# EAGLE board switch_strip (EAGLE 9.2.2)

Size 46.97 x 120.32 mm. Coordinates in mm from the lower left corner, seen from the top.
Outline: 0,0 46.97,0 46.97,120.32 0,120.32 0,0
Copper layers (1*16): Top 0.035mm / dielectric 1.5mm / Bottom 0.035mm
Design rules "default": minimum track width 6mil, minimum drill 0.35mm, track to track 6mil, track to pad 6mil, pad to pad 6mil, via to via 6mil, smd to smd 6mil, copper to edge 40mil, drill to drill 6mil, minimum pad ring 10mil, minimum via ring 8mil, stop-mask expansion 4mil, vias tented up to drill 0mil, thermal gap 10mil

## Footprints (pad centres in the part's own frame; a part is rotated, then mirrored left to right if it is on the bottom)
DO-1N4148 = drill 0.9: A -3.81,0; C 3.81,0
JP4 = drill 0.914 long: 1 -3.81,0; 2 -1.27,0; 3 1.27,0; 4 3.81,0
JP1 = drill 0.914 long: 1 0,-1.27; 2 0,1.27
CHERRY-MX-LED = drill 1.016 pad 1.778: LED+ -1.27,-5.08; LED- 1.27,-5.08 | drill 1.714 pad 1.93: P$3 -5.08,0; P$4 5.08,0 | drill 1.524 pad 2.286: SW1 -3.81,2.54; SW2 2.54,5.08 | hole 4.064: 0,0

## Placement (x,y rotation side)
D1  [DO-1N4148]  13.97,105.41 270 top
D2  [DO-1N4148]  13.97,86.36 270 top
D3  [DO-1N4148]  11.43,60.96 270 top
D4  [DO-1N4148]  11.43,44.45 270 top
D5  [DO-1N4148]  11.43,27.94 270 top
D6  [DO-1N4148]  11.43,11.43 270 top
JP1  [JP4]  38.1,60.96 270 top
JP2  [JP4]  38.1,50.8 270 top
JP3  [JP4]  38.1,40.64 270 top
JP4  [JP4]  6.35,60.96 90 top
JP5  [JP4]  6.35,50.8 90 top
JP6  [JP4]  6.35,40.64 90 top
JP7  [JP1]  21.59,116.84 270 top
U$1  CHERRY-MX-LED  [CHERRY-MX-LED]  22.86,105.41 0 top
U$2  CHERRY-MX-LED  [CHERRY-MX-LED]  22.86,86.36 0 top
U$3  CHERRY-MX-LED  [CHERRY-MX-LED]  22.86,67.31 0 top
U$4  CHERRY-MX-LED  [CHERRY-MX-LED]  22.86,48.26 0 top
U$5  CHERRY-MX-LED  [CHERRY-MX-LED]  22.86,29.21 0 top
U$6  CHERRY-MX-LED  [CHERRY-MX-LED]  22.86,10.16 0 top

## Library data of the parts
D1-D6 = adafruit
JP1-JP7 = jumper
U$1-U$6 = cherrymx

## Nets
N$1: JP7.1 U$1.SW1 U$2.SW1 U$3.SW1 U$4.SW1 U$5.SW1 U$6.SW1
N$2: D6.A U$6.SW2
N$3: D5.A U$5.SW2
N$4: D4.A U$4.SW2
N$5: D3.A U$3.SW2
N$6: D2.A U$2.SW2
N$7: D1.A U$1.SW2
N$8: JP7.2 U$1.LED- U$2.LED- U$3.LED- U$4.LED- U$5.LED- U$6.LED-
N$9: JP1.1 JP4.4 U$1.LED+
N$10: D1.C JP1.2 JP4.3
N$11: JP1.3 JP4.2 U$2.LED+
N$12: D2.C JP1.4 JP4.1
N$13: JP2.1 JP5.4 U$3.LED+
N$14: D3.C JP2.2 JP5.3
N$15: JP2.3 JP5.2 U$4.LED+
N$16: D4.C JP2.4 JP5.1
N$17: JP3.1 JP6.4 U$5.LED+
N$18: D5.C JP3.2 JP6.3
N$19: JP3.3 JP6.2 U$6.LED+
N$20: D6.C JP3.4 JP6.1